# Altium PCB C11204_boosterTI.PcbDoc
Units mm, origin at the board's own origin, x right, y up, seen from the top; angles counter-clockwise.
Board outline 51 x 55 mm, 2 copper layers (Top Layer, Bottom Layer); 53 components, 70 nets, 228 pads, 0 vias.
Unrouted connection lines stored in the file: 124.
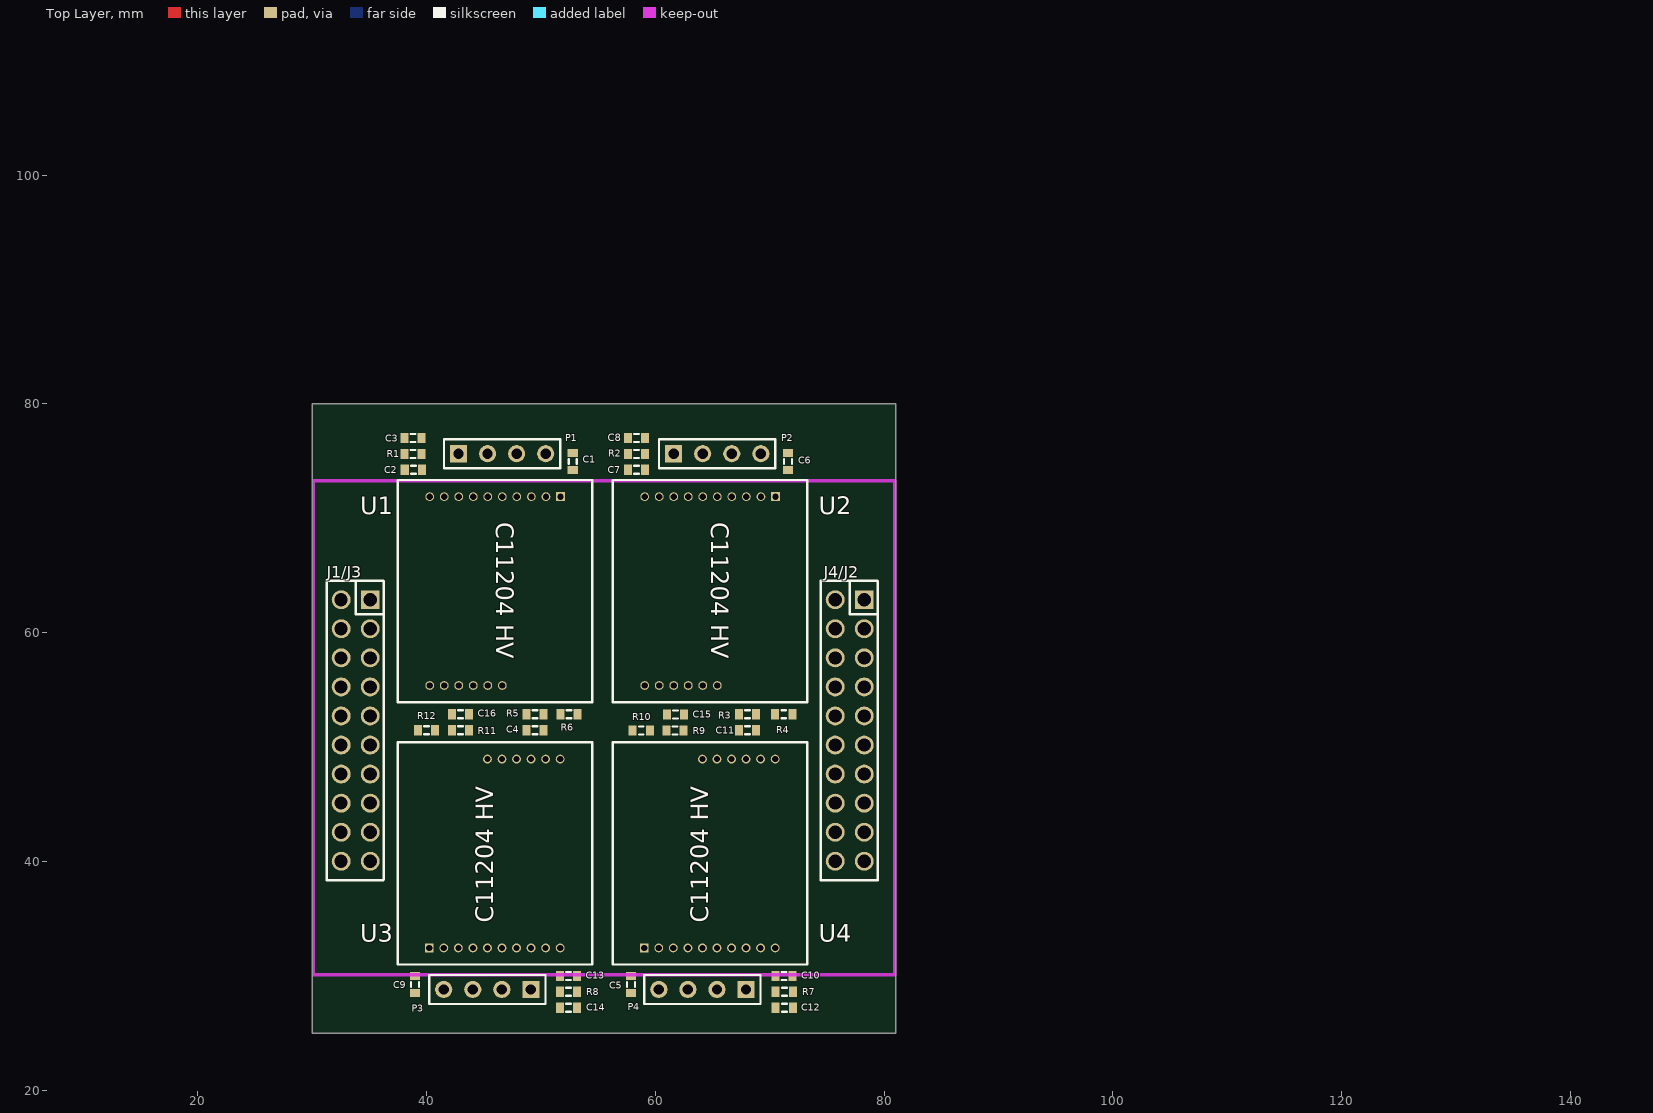
[diagram p0: Top Layer view]
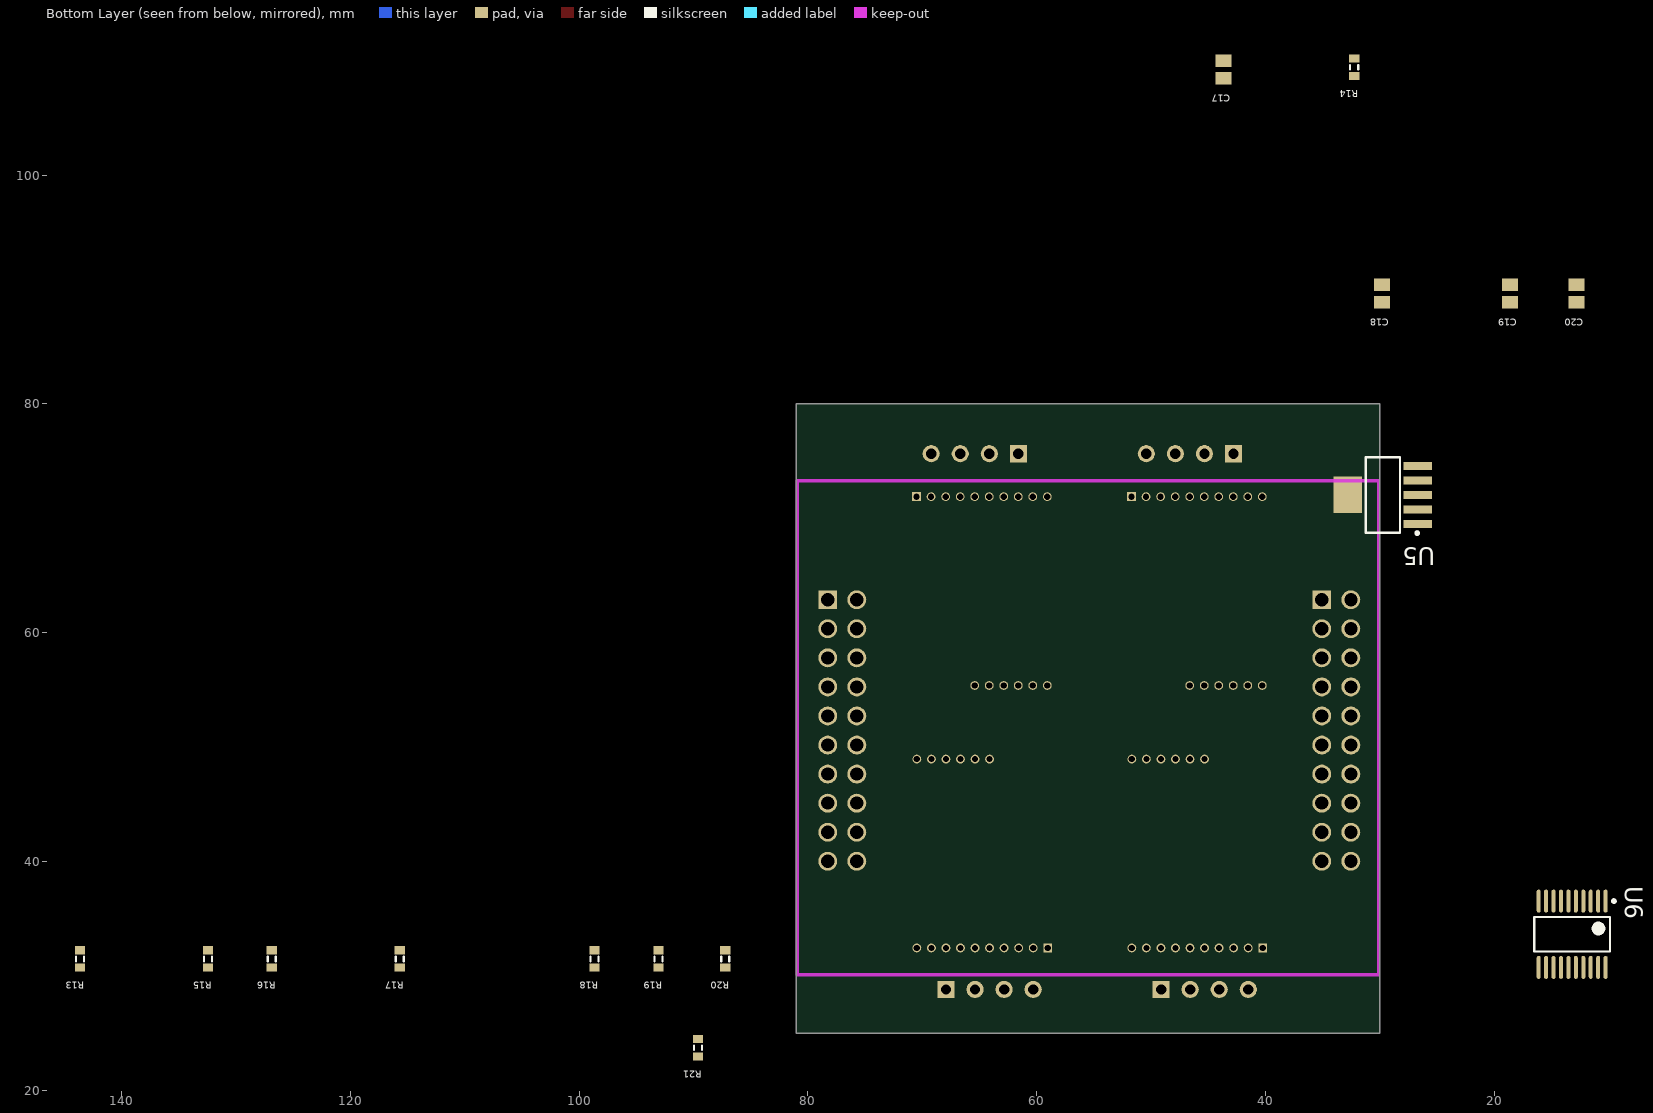
[diagram p1: Bottom Layer view, seen from below]

## Layer stack, top to bottom
Top Layer: signal copper 0.0356
Dielectric: core 0.32, FR-4, Dk 4.8
Bottom Layer: signal copper 0.0356

## Board outline
30,25 30,80 81,80 81,25

## Design rules (kind name [scope] priority, off if disabled: settings)
Clearance [All] p1: gap=0.127
MinimumSolderMaskSliver [All] p1: minsoldermaskwidth=0.127
PlaneClearance [All] p1: clearance=0.5
PolygonConnect [All] p1: connectstyle=Relief reliefconductorwidth=0.254 reliefentries=4 polygonreliefangle="90 Angle"
RoutingVias [All] p1: holewidth=0.6 width=1 viastyle="Through Hole" minholewidth=0.6 minwidth=1 maxholewidth=0.6 maxwidth=1
SilkscreenOverComponentPads SilkscreenOverComponentPads_1 [(InPadClass('Pads_Res_Cond') OR HasFootprint('6-0805_N') OR HasFootprint('J1-0603')OR HasFootPrint('SOT23-5')) vs (OnLayer('Top Overlay') OR OnLayer('Bottom Overlay'))] p1: minsilkscreentomaskgap=0.06
SilkscreenOverComponentPads [All] p2: minsilkscreentomaskgap=0.254
SolderMaskExpansion [All] p1: expansion=0.102
Width Width_1 [(InNet('+5v') OR InNet('GND') OR InNet('+70V_1') OR InNet('+70V_2')OR InNet('+70V_3')OR InNet('+70V_4') OR InNetClass('Potencia'))] p1: maxlimit=0.5 minlimit=0.5 preferedwidth=0.5 minimp=50.000000 maximp=50.000000 favimp=50.000000
Width [All] p2: maxlimit=0.254 minlimit=0.254 preferedwidth=0.254
25 further rules are at their usual default settings.

## Components (designator, comment, footprint, x,y, rotation, side; value= is the part's Value field where it differs from the comment)
C1 "Cap" J1-0603 52.775,74.975 r270 top
C2 "Cap" J1-0603 38.85,74.25 r180 top
C3 "Cap" J1-0603 38.825,77.025 r0 top
C4 "Cap" J1-0603 49.475,51.475 r0 top
C5 "Cap" J1-0603 57.875,29.25 r90 top
C6 "Cap" J1-0603 71.6,74.975 r270 top
C7 "Cap" J1-0603 58.35,74.25 r180 top
C8 "Cap" J1-0603 58.35,77.025 r0 top
C9 "Cap" J1-0603 39,29.25 r90 top
C10 "Cap" J1-0603 71.25,30 r0 top
C11 "Cap" J1-0603 68.05,51.475 r0 top
C12 "Cap" J1-0603 71.275,27.225 r180 top
C13 "Cap" J1-0603 52.4,30 r0 top
C14 "Cap" J1-0603 52.4,27.225 r180 top
C15 "Cap" J1-0603 61.775,52.85 r180 top
C16 "Cap" J1-0603 42.975,52.875 r180 top
C17 "Cap" C0805 43.682,109.227 r270 bottom
C18 "Cap" C0805 29.826,89.65 r270 bottom
C19 "Cap" C0805 18.65,89.65 r270 bottom
C20 "Cap" C0805 12.825,89.65 r270 bottom
J1/J3 "SSW-110-23-F-D" CONN_SSW-110-23-F-D 35.08,62.888 r90 top
J4/J2 "SSW-110-23-F-D" CONN_SSW-110-23-F-D 78.26,62.888 r90 top
P1 "Header 4" HDR1X4 42.8,75.65 r0 top
P2 "Header 4" HDR1X4 61.6,75.65 r0 top
P3 "Header 4" HDR1X4 49.125,28.825 r180 top
P4 "Header 4" HDR1X4 67.925,28.825 r180 top
R1 "Res3" J1-0603 38.825,75.625 r180 top
R2 "Res3" J1-0603 58.35,75.625 r180 top
R3 "1K" J1-0603 68.05,52.875 r0 top (schematic designator R5)
R4 "Res3" J1-0603 71.225,52.875 r180 top (schematic designator R3)
R5 "Res3" J1-0603 49.475,52.875 r0 top (schematic designator R4)
R6 "Res3" J1-0603 52.45,52.875 r180 top
R7 "Res3" J1-0603 71.275,28.612 r0 top
R8 "Res3" J1-0603 52.4,28.612 r0 top
R9 "Res3" J1-0603 61.725,51.45 r180 top
R10 "Res3" J1-0603 58.775,51.45 r0 top
R11 "Res3" J1-0603 42.975,51.475 r180 top
R12 "Res3" J1-0603 40,51.475 r0 top
R13 "Res3" J1-0603 143.607,31.502 r270 bottom
R14 "Res3" J1-0603 32.257,109.427 r270 bottom
R15 "Res3" J1-0603 132.431,31.502 r270 bottom
R16 "Res3" J1-0603 126.856,31.502 r270 bottom
R17 "Res3" J1-0603 115.681,31.502 r270 bottom
R18 "Res3" J1-0603 98.655,31.502 r270 bottom
R19 "Res3" J1-0603 93.055,31.502 r270 bottom
R20 "Res3" J1-0603 87.229,31.502 r270 bottom
R21 "Res3" J1-0603 89.6,23.725 r270 bottom
U1 "C11204_HV" C11204_HAM 51.71,71.9 r270 top
U2 "C11204_HV" C11204_HAM 70.5,71.9 r270 top
U3 "C11204_HV" C11204_HAM 40.25,32.45 r90 top
U4 "C11204_HV" C11204_HAM 59.04,32.45 r90 top
U5 "TPS73250" SOT-223-DC5_M 29.75,72.05 r0 bottom
U6 "LSF0108" TSSOP20_M 13.2,33.65 r270 bottom

## Footprints (in the part's own frame and the unit in brackets; to place one, negate y for a bottom-side part, rotate by r counter-clockwise, add the part's x,y. Pads: shape width x height; smd on the part's side, far side on the other; paste and mask are expansions set on the pad)
C0805 [mm] "Chip Capacitor, Body 2.0x1.3mm, IPC High Density"
  rect 1.1x1.4 smd: 1(-0.75,0) 2(0.75,0)
  body extent -1.1,-0.72 1.1,0.72, height 1.4
C11204_HAM [mm]
  rect 0.765x0.765 hole 0.55: 1(0,0)
  round 0.765 hole 0.55: 2(0,-1.27) 3(0,-2.54) 4(0,-3.81) 5(0,-5.08) 6(0,-6.35) 7(0,-7.62) 8(0,-8.89) 9(0,-10.16) 10(0,-11.43) 11(16.51,-11.43) 12(16.51,-10.16) 13(16.51,-8.89) 14(16.51,-7.62) 15(16.51,-6.35) 16(16.51,-5.08)
  silkscreen extent -1.45,-14.23 17.98,2.77
CONN_SSW-110-23-F-D [mm] "SAMTEC"
  rect 1.65x1.65 hole 1.15: 1(0,0)
  round 1.65 hole 1.15: 2(0,2.54) 3(-2.54,0) 4(-2.54,2.54) 5(-5.08,0) 6(-5.08,2.54) 7(-7.62,0) 8(-7.62,2.54) 9(-10.16,0) 10(-10.16,2.54) 11(-12.7,0) 12(-12.7,2.54) 13(-15.24,0) 14(-15.24,2.54) 15(-17.78,0) 16(-17.78,2.54) 17(-20.32,0) 18(-20.32,2.54) 19(-22.86,0) 20(-22.86,2.54)
  silkscreen extent -24.51,-1.19 1.65,3.81, body extent -24.43,-1.24 1.57,3.81, height 8.59
HDR1X4 [mm] "Connector; Header; 4 Position"
  rect 1.5x1.5 hole 0.9: 1(0,0)
  round 1.5 hole 0.9: 2(2.54,0) 3(5.08,0) 4(7.62,0)
  silkscreen extent -1.27,-1.27 8.89,1.27
J1-0603 [mm] "Chip Resistor, Body 1.6x0.8mm, IPC High Density"
  rect 0.7x0.9 smd: 1(-0.75,0) 2(0.75,0)
  silkscreen extent -0.2,-0.35 0.2,0.35, body extent -0.85,-0.48 0.85,0.48, height 0.9
SOT-223-DC5_M [mm] "SOT223, 6-Leads, Body 6.5x3.5mm, Pitch 1.27mm, Lead Span 7mm, IPC Low Density"
  rect 2.5x0.7 smd: 1(-3.05,2.54) 2(-3.05,1.27) 3(-3.05,0) 4(-3.05,-1.27) 5(-3.05,-2.54)
  rect 2.5x3.2 smd: 6(3.05,0)
  silkscreen extent -3.12,-3.3 1.5,3.46, body extent -1.77,-3.27 1.77,3.27, height 1.8
TSSOP20_M [mm] "TSOP, 20-Leads, Body 6.5x4.4mm, Pitch 0.65mm, IPC Low Density"
  oval 2x0.35 smd: 1(-2.9,2.925) 2(-2.9,2.275) 3(-2.9,1.625) 4(-2.9,0.975) 5(-2.9,0.325) 6(-2.9,-0.325) 7(-2.9,-0.975) 8(-2.9,-1.625) 9(-2.9,-2.275) 10(-2.9,-2.925) 11(2.9,-2.925) 12(2.9,-2.275) 13(2.9,-1.625) 14(2.9,-0.975) 15(2.9,-0.325) 16(2.9,0.325) 17(2.9,0.975) 18(2.9,1.625) 19(2.9,2.275) 20(2.9,2.925)
  silkscreen extent -3.02,-3.3 1.5,3.77, body extent -2.25,-3.3 2.25,3.3, height 1.1

## Part data
C1 C2 C3 C4 C5 C6 C7 C8 C9 C10 C11 C12 C13 C14 C15 C16 C17 C18 C19 C20: "Capacitor"
J1/J3 J4/J2: "Connector, Receptacle, 100mil, 10x2, Gold plated, TH"
P1 P2 P3 P4: "Header, 4-Pin"
R1 R2 R4 R5 R6 R7 R8 R9 R10 R11 R12 R13 R14 R15 R16 R17 R18 R19 R20 R21: "Resistor"
R3: library part Res3, "Resistor"

## Nets (pads, with @x,y where several pads share a name; then routed paths per layer and width w, separated by ;. In a path a pad name is that pad's centre, name@x,y a point inside that pad or via, vN(x,y) a via of type N, cw(c..) or ccw(c..) an arc to the next point about the centre after c; other vN are vias at no path point)
3.3V: J1/J3.2 U6.2
+5V: C1.2 C5.2 C6.2 C9.2 C19.1 R13.1 R14.1 R15.1 R16.1 R17.1 R20.2 R21.2 U1.1 U2.1 U3.1 U4.1 U5.2
+70V_1: C3.2 P1.1 R1.1
+70V_2: C8.2 P2.1 R2.1
+70V_3: C14.2 P3.1 R8.1
+70V_4: C12.2 P4.1 R7.1
GND: C1.1 C2.1 C3.1 C4.1 C5.1 C6.1 C7.1 C8.1 C9.1 C10.1 C11.1 C12.1 C13.1 C14.1 C15.1 C16.1 C17.1 C18.1 C19.2 C20.1 J1/J3.3 J4/J2.1 P1.2 P1.4 P2.2 P2.4 P3.2 P3.4 P4.2 P4.4 U1.2 U1.5 U1.8 U2.2 U2.5 U2.8 U3.2 U3.5 U3.8 U4.2 U4.5 U4.8 U5.3 U5.6 U6.1
NetC2_2: C2.2 R1.2 U1.10
NetC4_2: C4.2 R5.2 R6.2
NetC7_2: C7.2 R2.2 U2.10
NetC10_2: C10.2 R7.2 U4.10
NetC11_2: C11.2 R3.2 R4.2
NetC13_2: C13.2 R8.2 U3.10
NetC15_2: C15.2 R9.2 R10.2
NetC16_2: C16.2 R11.2 R12.2
NetC17_2: C17.2 R14.2 U6.19 U6.20
NetC20_2: C20.2 U5.4
NetJ1/J3_4: J1/J3.4
NetJ1/J3_5: J1/J3.5
NetJ1/J3_6: J1/J3.6
NetJ1/J3_7: J1/J3.7
NetJ1/J3_8: J1/J3.8
NetJ1/J3_9: J1/J3.9
NetJ1/J3_10: J1/J3.10 U6.10
NetJ1/J3_11: J1/J3.11
NetJ1/J3_12: J1/J3.12 U6.9
NetJ1/J3_13: J1/J3.13
NetJ1/J3_14: J1/J3.14
NetJ1/J3_15: J1/J3.15
NetJ1/J3_16: J1/J3.16
NetJ1/J3_17: J1/J3.17
NetJ1/J3_18: J1/J3.18
NetJ1/J3_19: J1/J3.19
NetJ1/J3_20: J1/J3.20
NetJ4/J2_2: J4/J2.2
NetJ4/J2_3: J4/J2.3
NetJ4/J2_4: J4/J2.4
NetJ4/J2_5: J4/J2.5
NetJ4/J2_6: J4/J2.6
NetJ4/J2_7: J4/J2.7
NetJ4/J2_8: J4/J2.8 U6.4
NetJ4/J2_9: J4/J2.9
NetJ4/J2_10: J4/J2.10 U6.3
NetJ4/J2_11: J4/J2.11
NetJ4/J2_12: J4/J2.12 U6.8
NetJ4/J2_13: J4/J2.13
NetJ4/J2_14: J4/J2.14 U6.7
NetJ4/J2_15: J4/J2.15
NetJ4/J2_16: J4/J2.16 U6.6
NetJ4/J2_17: J4/J2.17
NetJ4/J2_18: J4/J2.18 U6.5
NetJ4/J2_19: J4/J2.19
NetJ4/J2_20: J4/J2.20
NetP1_3: P1.3 R6.1
NetP2_3: P2.3 R4.1
NetP3_3: P3.3 R12.1
NetP4_3: P4.3 R10.1
NetR3_1: R3.1 U2.16
NetR5_1: R5.1 U1.16
NetR9_1: R9.1 U4.16
NetR11_1: R11.1 U3.16
NetR13_2: R13.2 U1.3 U6.18
NetR15_2: R15.2 U1.4 U6.17
NetR16_2: R16.2 U3.3 U6.16
NetR17_2: R17.2 U3.4 U6.15
NetR18_1: R18.1 U2.3 U6.14
NetR19_1: R19.1 U2.4 U6.13
NetR20_1: R20.1 U4.3 U6.12
NetR21_1: R21.1 U4.4 U6.11
VBUS: C18.2 J1/J3.1 U5.1 U5.5
pads on no net: R18.2 R19.2 U1.6 U1.7 U1.9 U1.11 U1.12 U1.13 U1.14 U1.15 U2.6 U2.7 U2.9 U2.11 U2.12 U2.13 U2.14 U2.15 U3.6 U3.7 U3.9 U3.11 U3.12 U3.13 U3.14 U3.15 U4.6 U4.7 U4.9 U4.11 U4.12 U4.13 U4.14 U4.15

## Keep-outs
Keep-Out Layer:
  lines w0.3: 30.125,30.1 80.925,30.1 80.925,73.28 30.125,73.28 30.125,30.1

## Silkscreen, mask and mechanical layers (free items; w line width, h text height)
Mechanical 13:
  the board outline again, w0.254

## Text inside footprints (layer, text, board x,y; h text height)
U1: Top Overlay "C11204 HV" at 46.117,69.675 h1.52 r270
U2: Top Overlay "C11204 HV" at 64.908,69.675 h1.52 r270
U3: Top Overlay "C11204 HV" at 45.843,34.675 h1.52 r90
U4: Top Overlay "C11204 HV" at 64.633,34.675 h1.52 r90